# Altium PCB SmartScale.PcbDoc
Units mm, origin at the board's own origin, x right, y up, seen from the top; angles counter-clockwise.
Board outline 71 x 26 mm, 2 copper layers (Top Layer, Bottom Layer); 29 components, 26 nets, 127 pads, 0 vias.
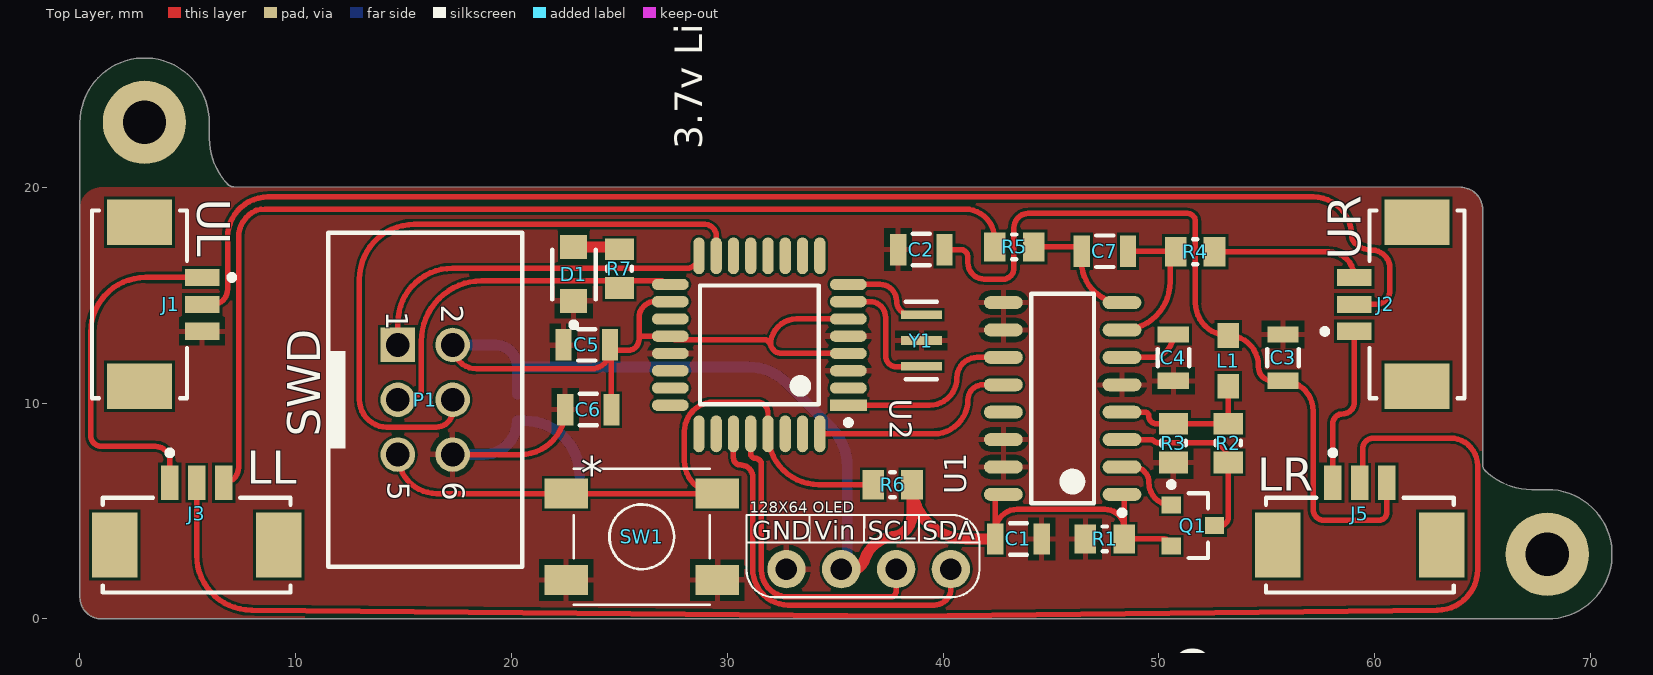
[diagram p0: Top Layer view]
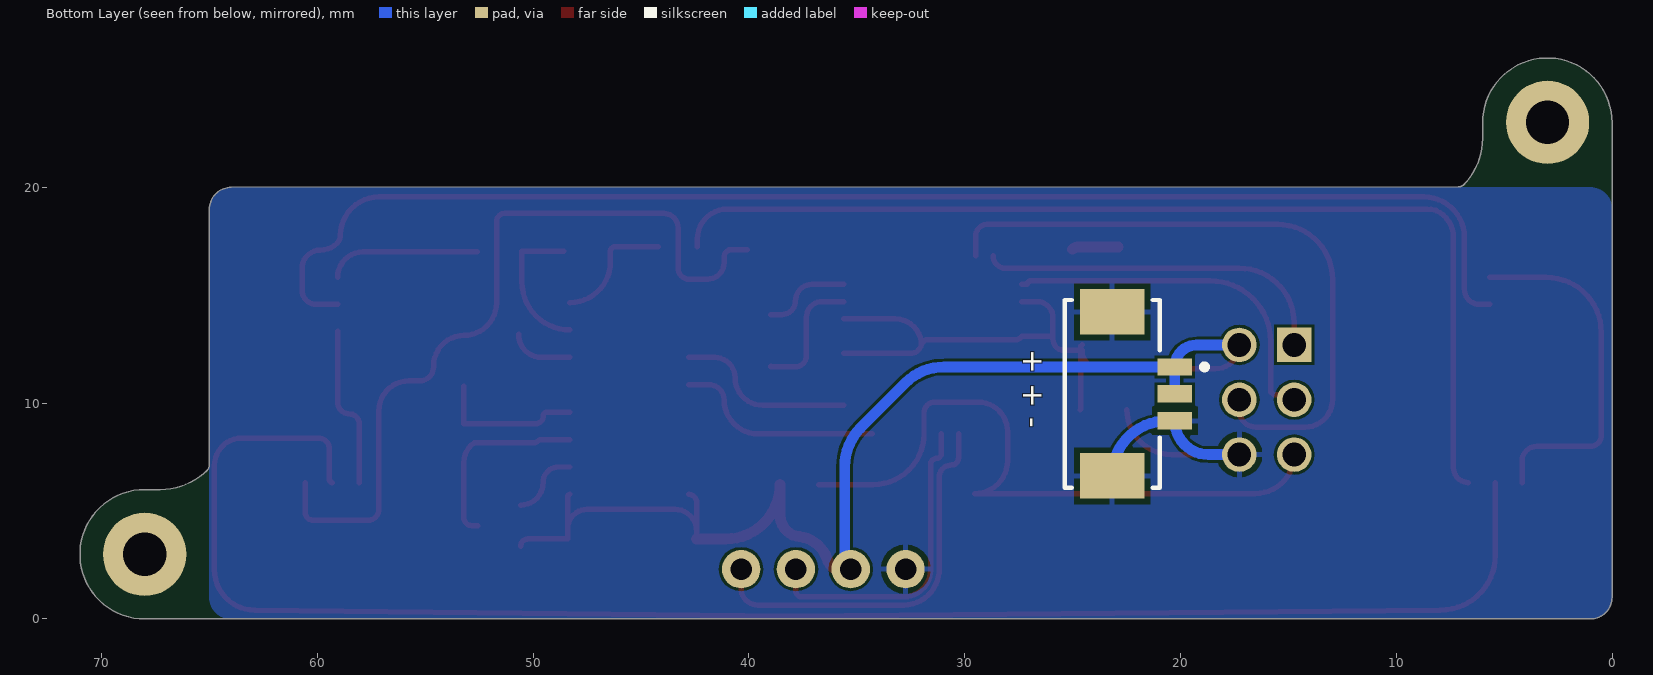
[diagram p1: Bottom Layer view, seen from below]
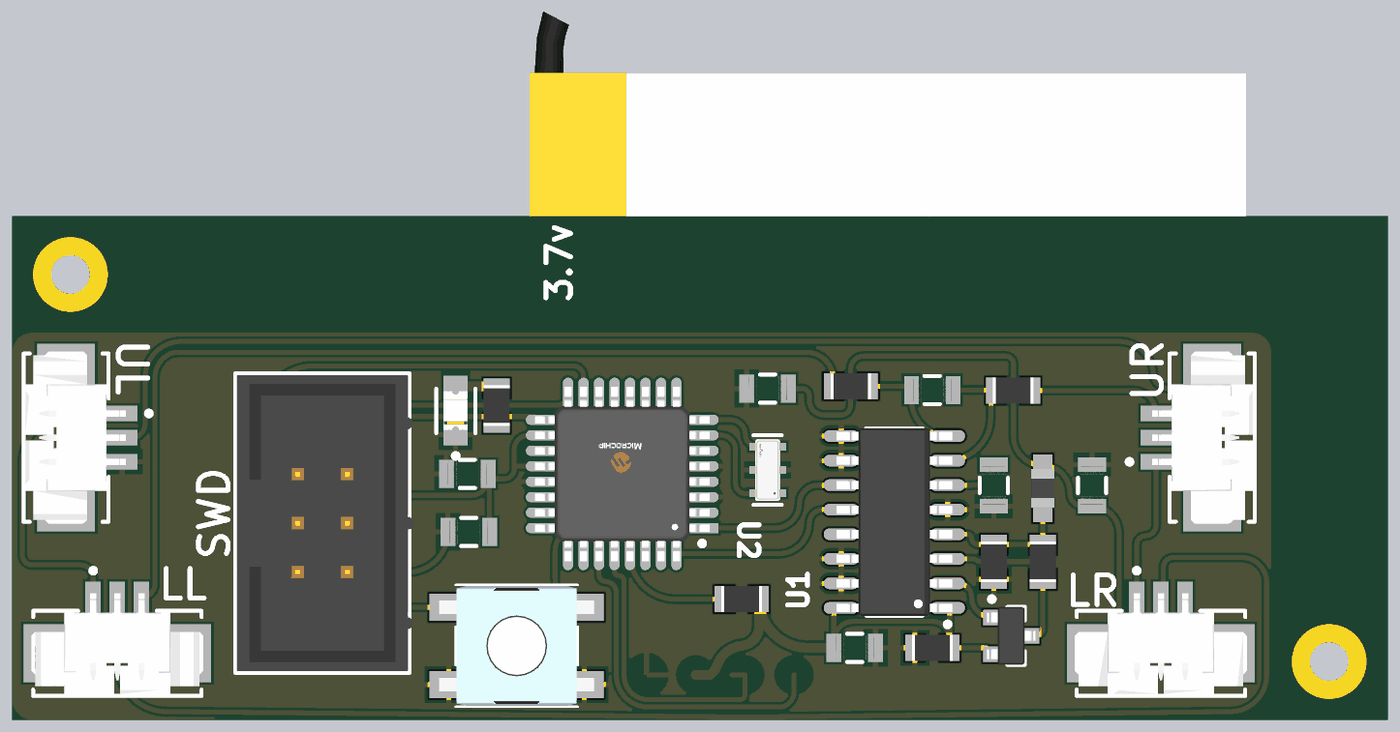
[diagram p2: 3D render of the assembled board from above, using the file's embedded part models]

## Layer stack, top to bottom
Top Solder: solder mask 0.0102, Solder Resist, Dk 3.5
Top Layer: signal copper 0.0356
Dielectric 1: dielectric 0.32, FR-4, Dk 4.8
Bottom Layer: signal copper 0.0356
Bottom Solder: solder mask 0.0102, Solder Resist, Dk 3.5

## Board outline
0,1 ccw(c1,1) 1,0 1.5,0 64,0 68,0 ccw(c68,3) 68,6 67.27,6 cw(c67.27,9.066) 65.102,6.898 cw(c65.336,7.132) 65.005,7.132 65,7.132 65,19 ccw(c64,19) 64,20 7.12,20.023 cw(c7.12,20.354) 6.885,20.12 6.898,20.102 cw(c9.066,22.27) 6,22.27 6,23 ccw(c3,23) 0,23

## Design rules (kind name [scope] priority, off if disabled: settings)
Clearance [All] p1: gap=0.127 ignorepadtopadclearanceinfootprint=FALSE except(0: Arc-Hole Track-Hole SMDPad-Hole THPad-Hole Via-Hole Fill-Hole Poly-Hole Region-Hole Text-Hole)
PolygonConnect [All] p1: connectstyle=Relief reliefconductorwidth=0.254 reliefentries=4 polygonreliefangle="90 Angle" airgapwidth=0.254
RoutingVias [All] p1: holewidth=0.711 width=1.27 viastyle="Through Hole" minholewidth=0.711 minwidth=1.27 maxholewidth=0.711 maxwidth=1.27
SolderMaskExpansion [All] p1: expansion=0.102 istentingtop=FALSE
Width [All] p1: maxlimit=1 minlimit=0.127 preferedwidth=0.254 minimp=50.000000 maximp=50.000000 favimp=50.000000
30 further rules are at their usual default settings.

## Classes and differential pairs
component class SmartScale: C1 C2 C3 C4 C5 C6 C7 D1 J1 J2 J3 J5 L1 P1 Q1 R1 R2 R3 R4 R5 R6 R7 SW1 U1 U2 Y1

## Components (designator, comment, footprint, x,y, rotation, side; value= is the part's Value field where it differs from the comment)
"3.7v Li-Po" "Comment" "LI-PO BATTERY" 24.892,19.812 r0 top
* "Oled 128x64" "OLED 128X64" 17.551,-23.119 r0 top
"+ + -" "UL" CONN_1X3_SMD 23.164,10.432 r270 bottom (schematic designator J4)
C1 "1.0uF" Cap_0805 43.493,3.709 r180 top
C2 "1.0uF" Cap_0805 38.991,17.119 r0 top
C3 "0.1uF" Cap_0805 55.751,12.112 r270 top
C4 "0.1uF" Cap_0805 50.671,12.112 r90 top
C5 "1.0uF" Cap_0805 23.486,12.704 r0 top
C6 "0.1uF" Cap_0805 23.561,9.704 r0 top
C7 "0.1uF" Cap_0805 47.496,17.044 r0 top
D1 "AVR_PRG" led_0805 22.883,15.984 r90 top
J1 "UL" CONN_1X3_SMD 2.761,14.579 r270 top
J2 "UR" CONN_1X3_SMD 61.961,14.579 r90 top
J3 "LL" CONN_1X3_SMD 5.411,3.424 r0 top
J5 "LR" CONN_1X3_SMD 59.311,3.424 r0 top
L1 "3.3uH" "SMD 0805_A" 53.211,11.964 r270 top
P1 "SWD" BoxHeader_2*6 16.002,10.16 r270 top
Q1 "MMBT4403LT1G" DIOD-SOT23-3_V 51.576,4.331 r0 top
R1 "10K" Res_0805 47.496,3.709 r0 top
R2 "20K" Res_0805 53.211,8.154 r270 top
R3 "8.2K" Res_0805 50.671,8.154 r90 top
R4 "100" Res_0805 51.678,17.018 r180 top
R5 "100" Res_0805 43.291,17.245 r0 top
R6 "10K" Res_0805 37.657,6.223 r0 top
R7 "1K" Res_0805 25,16.238 r270 top
SW1 "Reset" Button_smd 26.035,3.81 r180 top
U1 "HX711" TSOP16 45.541,10.219 r180 top
U2 "ATMEGA328P-ANR" ATMEGA328P_TQFP 31.486,12.704 r180 top
Y1 "16Mhz" Resonator_16Mhz 38.994,12.904 r270 top

## Footprints (in the part's own frame and the unit in brackets; to place one, negate y for a bottom-side part, rotate by r counter-clockwise, add the part's x,y. Pads: shape width x height; smd on the part's side, far side on the other; paste and mask are expansions set on the pad)
ATMEGA328P_TQFP [mm]
  rect 1.704x0.526 smd paste+0 mask+0: 1(-4.125,2.8)
  rrect100% 1.704x0.526 smd paste+0 mask+0: 2(-4.125,2) 3(-4.125,1.2) 4(-4.125,0.4) 5(-4.125,-0.4) 6(-4.125,-1.2) 7(-4.125,-2) 8(-4.125,-2.8) 17(4.125,-2.8) 18(4.125,-2) 19(4.125,-1.2) 20(4.125,-0.4) 21(4.125,0.4) 22(4.125,1.2) 23(4.125,2) 24(4.125,2.8)
  rrect100% 0.526x1.704 smd paste+0 mask+0: 9(-2.8,-4.125) 10(-2,-4.125) 11(-1.2,-4.125) 12(-0.4,-4.125) 13(0.4,-4.125) 14(1.2,-4.125) 15(2,-4.125) 16(2.8,-4.125) 25(2.8,4.125) 26(2,4.125) 27(1.2,4.125) 28(0.4,4.125) 29(-0.4,4.125) 30(-1.2,4.125) 31(-2,4.125) 32(-2.8,4.125)
  silkscreen extent -4.25,-2.75 2.75,3.72, body extent -5.23,-5.23 5.23,5.23, height 0.25
BoxHeader_2*6 [mm] "6 pins, straight, gold plating"
  rect 1.6x1.6 hole 1.1: 1(-2.54,-1.27)
  round 1.6 hole 1.1: 2(-2.54,1.27) 3(0,-1.27) 4(0,1.27) 5(2.54,-1.27) 6(2.54,1.27)
  silkscreen extent -7.74,-4.5 7.74,4.5, body extent -7.64,-4.43 7.64,4.75, height 9.13
Button_smd [mm] "6*6mm vertical type, SMD, height 2.5mm, salmon actuator, 360gf, T&R"
  rect 2x1.4 smd: 1(-3.5,2) 2(3.5,2) 3(-3.5,-2) 4(3.5,-2)
  silkscreen extent -3.15,-3.15 3.15,3.15, body extent -4,-3.1 4,3.1, height 2.49
Cap_0805 [mm]
  rect 0.756x1.456 smd paste+0 mask+0: 1(-1.075,0) 2(1.075,0)
  silkscreen extent -0.4,-0.73 0.4,0.73, body extent -1.7,-0.98 1.7,0.98, height 0.25
CONN_1X3_SMD [mm]
  rect 0.8x1.6 smd paste+0 mask+0: 1(-1.25,2.9) 2(0,2.9) 3(1.25,2.9)
  rect 2.1x3 smd paste+0 mask+0: 4(-3.8,0) 5(3.8,0)
  silkscreen extent -4.35,-2.2 4.35,4.4, body extent -4.45,-2.1 4.45,3.1, height 3.6
DIOD-SOT23-3_V [mm] "SOT23, 3-Leads, Body 3x1.4mm, Pitch 0.95mm"
  rect 0.9x0.8 smd: 1(-1,0.95) 2(-1,-0.95) 3(1,0)
  silkscreen extent -1.12,-1.5 0.7,2.02, body extent -1.25,-1.5 1.25,1.5, height 1.1
led_0805 [mm]
  rect 1.1x1.25 smd paste+0 mask+0: 1(-1.25,0) 2(1.25,0)
  silkscreen extent -2.47,-1.02 1.12,1, body extent -1.9,-0.77 1.9,0.77, height 0.25
"LI-PO BATTERY" [mm]
  body extent 1.82,1.62 38.82,16.81
"OLED 128X64" [mil]
  round 70 hole 39.37: 1(598.03,1001.18) 2(698.03,1001.18) 3(798.03,1001.18) 4(898.03,1001.18)
  Bottom Layer lines w10: 598.03,1001.18 599.06,1000.16 ; 698.03,1001.18 699.06,1000.16 ; 798.03,1001.18 799.06,1000.16 ; 898.03,1001.18 900,1003.15
  silkscreen extent 525,950 950,1100, body extent 213,-7 1287,1067, height 379
Res_0805 [mm] "Chip Resistor, 2-Leads, Body 2.1x1.35mm, IPC Medium Density"
  rect 1x1.35 smd: 1(-0.9,0) 2(0.9,0)
  silkscreen extent -0.1,-0.58 0.1,0.58, body extent -1.05,-0.68 1.05,0.67, height 0.6
Resonator_16Mhz [mm]
  rect 0.4x1.9 smd paste+0 mask+0: 1(1.2,0) 2(0,0) 3(-1.2,0)
  silkscreen extent -1.8,-0.72 1.8,0.72, body extent -1.78,-1.05 1.78,1.05, height 0.25
"SMD 0805_A" [mm] "Chip Inductor, 2-Leads, Body 2,0x1,2mm"
  rect 1.15x1 smd: 1(-1.175,0) 2(1.175,0)
  body extent -1,-0.6 1,0.6, height 0.89
TSOP16 [mm] "TSOP, 16-Leads, Body 9,90x3,90mm, Pitch 1,27mm, IPC Medium Density"
  oval 1.8x0.6 smd: 1(-2.75,4.445) 2(-2.75,3.175) 3(-2.75,1.905) 4(-2.75,0.635) 5(-2.75,-0.635) 6(-2.75,-1.905) 7(-2.75,-3.175) 8(-2.75,-4.445) 9(2.75,-4.445) 10(2.75,-3.175) 11(2.75,-1.905) 12(2.75,-0.635) 13(2.75,0.635) 14(2.75,1.905) 15(2.75,3.175) 16(2.75,4.445)
  silkscreen extent -2.88,-4.85 1.45,5.42, body extent -3,-4.85 3,4.85, height 1.6

## Part data
"+ + -" J1 J2 J3 J5: library part CONN_1X3_SMD, "CONN HEADER SMD R/A 3POS 1.25MM", Ambient Temperature Range High=+105°C, Ambient Temperature Range Low=-40°C, Current Rating=1A, Manufacturer=Molex, Manufacturer Part Number=53261-0371, Package=0, Temperature="-40°C to +105°C", Voltage Rating=125V, Automotive=No, Category=Conn, ComponentLink2Description=Datasheet, ComponentLink2URL=https://www.molex.com/webdocs/datasheets/pdf/en-us/0532610371_PCB_HEADERS.pdf, Conn Gender=Male, Conn Orientation="Right Angle", Contact Material=Tin,Nickel, Device Class L1=Connectors, Device Class L2="Headers and Wire Housings", Device Class L3=unset, Digikey Description="CONN HEADER SMD R/A 3POS 1.25MM", Footprint Url=https://www.molex.com/pdm_docs/sd/532610371_sd.pdf, Height=3.6mm, Lead Free=Yes, Mouser Description="1.25mm (.049\") Pitch PicoBlade Header, Surface Mount, Right Angle, Lead-free, 3 Circuits", Number Of Contacts=3, Number Of Rows=1, Octopart=https://octopart.com/53261-0371-molex-655314, Pitch=1.25mm, RoHS=TRUE, Temperature Range High=+105°C, Temperature Range Low=-40°C
C1 C2 C5: library part Cap_1.0uf, Manufacturer=Kemet, Part Number=C0805C105K4PACTU
C3 C4 C6 C7: library part Cap_0.1uf_0805, "Cap Ceramic 100nF 100V X7R 10% Pad SMD 0805 +125°C Automotive T/R", Capacitance=100nF, Case Code (Metric)=2012, Case Code (Imperial)=0805, Dielectric=X7R, Max Operating Temperature=125°C, Min Operating Temperature=-55°C, Package Quantity=1, Ratings=AEC-Q200, Tolerance=10%, Voltage Rating=100V, Case/Package=0805, Composition=Ceramic, Depth=1.25mm, Height=1.25mm, Lead Free="Lead Free", Length=2mm, Mount="Surface Mount", Packaging="Tape and Reel", Radiation Hardening=No, REACH SVHC="No SVHC", Termination=SMD/SMT, Thickness=0.057inch, Voltage Rating (DC)=100V, Weight=0.000194oz, Width=0.049inch
D1: library part Led_0805, "LED BLUE CLEAR CHIP SMD", Case Code (Metric)=2012, Case Code (Imperial)=0805, Color=Blue, Forward Current=20mA, Forward Voltage=3.8V, Lens Color=Colorless, Max Operating Temperature=80°C, Min Operating Temperature=-20°C, Package Quantity=1, Power Dissipation=76mW, Reverse Voltage=5V, Case/Package=0805, Depth=1.25mm, Dominant Wavelength=475nm, Height=0.8mm, Lead Free="Lead Free", Length=2mm, Lens Style=Diffused, Lens Transparency=Clear, Luminous Intensity=180mcd, Mount="Surface Mount", Number of Elements=1, Number of LEDs=1, Number of Pins=2, Packaging="Tape and Reel", Radiation Hardening=No, Test Current=20mA, Viewing Angle=130°, Wavelength=468nm, Width=1.25mm, Illumination Color=Blue
L1: library part COIL_3.3uH_0805, "Power Multilayer Inductor WE-PMI, L=3.30 µH", Manufacturer="Wuerth Elektronik", PartNumber=74479775233, Inductance="3.30 ÂµH", ComponentLink1Description="Manufacturer URL", ComponentLink1URL=http://www.we-online.com, ComponentLink2Description=Datasheet, ComponentLink2URL=http://katalog.we-online.de/kataloge/eisos/media/pdf/74479775233.pdf, PackageReference="SMD 0805_A"
P1: library part BoxHeader_2*6, "Male Box Header WR-BHD, THT, Vertical, pitch 2.54 mm, 6 pins", Contact Resistance=20mOhm, Manufacturer="Wurth Elektronik", Operating Temperature=-40to125degC, Package Reference=61200621621, Withstanding Voltage=500VAC, Working Voltage=250VAC, Datasheet URL=https://katalog.we-online.de/em/datasheet/6120xx21621.pdf, Gender=Male, Manufacturer URL=http://www.we-online.de, Mounting Technology=THT, Orientation=Vertical, Packaging=Tray, Part Number=61200621621, Pin Number=6, Pitch=2.54mm, Published Date=August2018, Publisher=WurthElektronik
Q1: library part BJT, "Switching Transistor, PNP Silicon, 3-Pin SOT-23, Pb-Free, Tape and Reel", Manufacturer="On Semiconductor", ComponentLink1Description="Manufacturer URL", ComponentLink1URL=http://www.onsemi.com/, ComponentLink2Description=Datasheet, ComponentLink2URL=http://www.onsemi.cn/pub_link/Collateral/MMBT4403LT1-D.PDF, ComponentLink3Description="Package Specification", ComponentLink3URL=http://www.onsemi.cn/pub_link/Collateral/318-08.PDF, DatasheetVersion="Rev. 12", fT Min (MHz)=200, Mounting Technology="Surface Mount", PackageDescription="3-Pin Small Outline Transistor, Body 2.92 x 1.3 mm, Pitch 0.95 mm", PackageReference=SOT-23-3-318-08, PackageVersion="Rev. AP, 11/2009", Packing="Tape and Reel", PartNumber=MMBT4403LT1G, Polarity=PNP, RoHS=TRUE, IC Continuous (A)=-0.6
R1 R6: library part Res_10k_0805, "Chip Resistor, 10 KOhm, +/- 1%, 0.125 W, -55 to 155 degC, 0805 (2012 Metric), RoHS, Tape and Reel", Manufacturer=Yageo, Max Operating Temperature="155 degC", Min Operating Temperature="-55 degC", Package Quantity=5000, Voltage Rating="150 V", ComponentLink1Description="Manufacturer URL", ComponentLink1URL=http://www.yageo.com/, ComponentLink2Description=Datasheet, ComponentLink2URL=http://www.yageo.com/documents/recent/PYu-RC_Group_51_RoHS_L_04.pdf, DatasheetVersion="Rev. 4, 02/2016", Height="0.5 mm", Length="2 mm", Mount="Surface Mount", Mounting Technology="Surface Mount", PackageDescription="2-Pin Surface Mounted Device, Body 2 x 1.25 mm", PackageReference=0805, Packaging="Tape and Reel", Pins=2, REACH SVHC="No SVHC", RoHSCompliant=true
R2: library part RES_20K, Manufacturer="Vishay Dale", Part Number=CRCW080520K0JNEA
R3: library part Res_8.2K, Manufacturer=Panasonic, Part Number=ERJ-6GEYJ822V
R4 R5: library part Res_100, Manufacturer="Vishay Dale", Part Number=CRCW0805100RFKEA
R7: library part res_1k_0805, "Chip Resistor, 1 KOhm, +/- 1%, 125 mW, -55 to 155 degC, 0805 (2012 Metric), RoHS, Tape and Reel", Case Code (Metric)=2012, Case Code (Imperial)=0805, Manufacturer=Yageo, Max Operating Temperature=155degC, Max Power Dissipation=125mW, Min Operating Temperature=-55degC, Package Description="2-Pin Surface Mounted Device, Body 2 x 1.25 mm", Package Quantity=1, Resistance=1KOhm, Temperature Coefficient=100ppm/degreesC, Tolerance=1%, Voltage Rating=150V, Case/Package=0805, Composition=ThickFilm, Datasheet URL=http://www.yageo.com/NewPortal/yageodocoutput?fileName=/pdf/R-Chip/PYu-RC_Group_51_RoHS_L_5.pdf, Datasheet Version="Rev. 5, 10/2016", Depth=1.25mm, Height=0.024inch, Lead Free=LeadFree, Length=0.079inch, Manufacturer URL=http://www.yageo.com/, Military Standard=Not, Number of Pins=2, Number of Terminations=2, Package Reference=0805, Packaging=TapeandReel, Power Rating=125mW, REACH SVHC=Unknown, RoHSCompliant=true, Termination=SMD/SMT, Voltage Rating (DC)=150V, Width=0.049inch
SW1: library part Button_smd, "WS-TASV SMD Tact Switch 6X6 mm", Manufacturer="Wuerth Elektronik", PartNumber=430451025836, ComponentLink1Description="Manufacturer URL", ComponentLink1URL=http://www.we-online.com, ComponentLink2Description=Datasheet, ComponentLink2URL=http://katalog.we-online.de/em/datasheet/4304x1.pdf, NoPins=04, PackageReference=430451025836
U1: "ADC for load cells", ComponentLink1Description=buying, ComponentLink1URL=https://ozdisan.com/entegre-devreler-ics/interface-entegreleri/analogtan-digitale-donusturucu-entegreler-adc/HX711
U2: library part ATMEGA328P_TQFP, "IC MCU 8BIT 32KB FLASH 32TQFP", Case/Package=TQFP, Frequency=20MHz, Max Operating Temperature=105°C, Min Operating Temperature=-40°C, Core Architecture=AVR, Memory Size=32KB, Memory Type=FLASH, Number of Pins=32, Number of I/Os=23, Oscillator Type=Internal, Packaging="Tape and Reel", Peripherals="Brown-out Detect/Reset", Interface=I2C
Y1: library part Resonator_16Mhz, "CERAMIC RES 16.0000MHZ 15PF SMD", Frequency=16MHz, Load Capacitance=15pF, Manufacturer=Murata, Manufacturer Part Number=CSTNE16M0V530000R0, Package=0, Temperature="-40°C to +85°C", Temperature Range High=+85°C, Temperature Range Low=-40°C, Tolerance=0.5%, Automotive=No, Category=Crys, ComponentLink2Description=Datasheet, ComponentLink2URL=https://www.murata.com/en-sg/products/productdata/8801162231838/SPEC-CSTNE16M0V530000R0.pdf?1545967809000, Device Class L1="Passive Components", Device Class L2="Crystals / Oscillators", Device Class L3=Crystals, Digikey Description="CERAMIC RES 16.0000MHZ 15PF SMD", Esr=40Ω, Height=1mm, Lead Free=Yes, Mouser Description="Ceramic Resonator 16MHz ±0.5% (Tol) ±0.3% (Stability) 15pF 40Ohm 3-Pin CSMD T/R", Octopart=https://octopart.com/cstne16m0v530000r0-murata-91406924, RoHS=TRUE, Series=CSTNE_V, Stability=0.3%

## Free pads (board coordinates)
  round 3.86 hole 2 unplated paste-1000 mask+0: ""(2.987,23.018) ""(68,3)

## Nets (pads, with @x,y where several pads share a name; then routed paths per layer and width w, separated by ;. In a path a pad name is that pad's centre, name@x,y a point inside that pad or via, vN(x,y) a via of type N, cw(c..) or ccw(c..) an arc to the next point about the centre after c; other vN are vias at no path point)
5V: "+ + -.1" "+ + -.2" *.2 C1.2 C5.2 C6.2 P1.2 Q1.2 R1.2 R6.2 U1.1 U1.16 U2.4 U2.6 U2.18 U2.20 | length 83.1
  Top Layer w0.254: P1.2 ccw(c18.377,12.7) 18.377,11.595 23.71,11.595 ccw(c23.71,12.446) 24.561,12.446 25.4,12.446 ccw(c25.4,12.954) 25.908,12.954 ; C5.2 24.625,12.64 24.625,9.715 C6.2 ; U2.18 26.642,14.704 ccw(c26.642,13.97) 25.908,13.97 25.908,12.954 ; U2.4 32.533,12.304 cw(c32.533,12.856) 32.004,12.7 ; U2.6 33.208,13.904 ccw(c33.208,12.7) 32.004,12.7 ; C1.2 C1.2@42.418,4.064 ; U1.16 ccw(c42.791,5.4) 42.418,5.4 C1.2@42.418,4.064 ; U1.1 cw(c48.291,5.669) 48.396,5.669 R1.2@48.396,4.182 ; Q1.2 ccw(c50.248,3.381) 50.248,3.709 R1.2 R1.2@48.396,4.182 ; 25.908,12.954 cw(c26.058,12.954) 26.058,13.104 U2.20 ccw(c27.595,13.202) 27.595,12.948 31.672,12.948 cw(c31.672,12.602) 32.004,12.7 ; C1.2@42.418,4.064 cw(c43.434,4.064) 43.434,5.08 47.498,5.08 cw(c47.498,4.182) R1.2@48.396,4.182
  Top Layer w0.508: *.2 36.017,2.311 ccw(c35.441,3.129) 36.387,2.804 cw(c37.821,2.311) 37.662,3.819 ccw(c37.557,4.814) 38.556,4.787 ccw(c36.017,4.851) 38.557,4.851 R6.2 ccw(c41.071,6.223) 41.071,3.709 C1.2
  Bottom Layer w0.5: P1.2 19.246,12.7 cw(c19.246,11.682) 20.264,11.682 ; 20.264,10.432 20.264,11.682 ; *.2@35.56,1.905 35.56,7.076 ccw(c33.02,7.076) 34.816,8.872 32.75,10.938 ccw(c30.954,9.142) 30.954,11.682 20.264,11.682
GND: "+ + -.3" "+ + -.4" "+ + -.5" *.1 C1.1 C2.1 C3.1 C4.1 C5.1 C6.1 D1.1 J1.3 P1.6 R1.1 R3.1 SW1.1 SW1.2 U1.5 U1.9 U1.10 U1.14 U1.15 U2.3 U2.5 U2.21 Y1.2 | length 14.6
  Top Layer w0.254: P1.6 20.402,7.62 ccw(c20.402,9.704) C6.1
  Bottom Layer w0.5: P1.6 18.702,7.62 ccw(c18.702,9.182) 20.264,9.182 20.624,9.182 cw(c20.624,6.642) 23.164,6.642 23.164,6.632
Net*_3: *.3 U2.28 | length 15.4
  Top Layer w0.254: U2.28 31.086,7.663 ccw(c31.306,7.663) 31.306,7.443 cw(c31.306,7.17) 31.579,7.17 31.579,2.275 ccw(c32.825,2.275) 32.825,1.029 33.207,1.029 37.493,1.029 37.566,1.029 ccw(c37.566,1.283) 37.818,1.249 ccw(c37.493,1.292) 37.821,1.292 *.3 *.3@37.155,2.311
Net*_4: *.4 U2.27 | length 18.2
  Top Layer w0.254: U2.27 30.286,7.463 ccw(c30.608,7.463) 30.608,7.14 cw(c30.608,6.57) 31.179,6.57 31.179,2.311 31.179,2.309 ccw(c32.854,2.309) 31.549,1.26 ccw(c32.826,2.287) 32.826,0.648 32.827,0.648 39.594,0.648 ccw(c39.594,1.415) 40.361,1.415 *.4
NetC2_2: C2.2 C3.2 J5.3 L1.1 | length 37.2
  Top Layer w0.254: C2.2 40.793,17.119 cw(c40.793,16.764) 41.148,16.764 41.148,16.51 ccw(c41.91,16.51) 41.91,15.748 42.775,15.748 ccw(c42.775,16.257) 43.284,16.257 43.284,18.138 cw(c43.942,18.138) 43.942,18.796 51.308,18.796 cw(c51.308,18.412) 51.692,18.412 51.692,14.658 ccw(c53.211,14.658) L1.1 cw(c53.211,11.74) 54.61,11.74 54.61,11.684 ccw(c55.257,11.684) 55.257,11.037 C3.2 cw(c55.751,9.638) 57.15,9.638 57.15,5.08 ccw(c57.658,5.08) 57.658,4.572 60.198,4.572 ccw(c60.198,4.935) 60.561,4.935 J5.3
NetC4_2: C4.2 U1.6 | length 3
  Top Layer w0.254: U1.6 49.608,12.124 ccw(c49.608,13.187) C4.2
NetC7_1: C7.1 R5.2 U1.8 | length 5.8
  Top Layer w0.254: R5.2 46.22,17.245 cw(c46.22,17.044) C7.1 46.421,16.534 ccw(c48.291,16.534) U1.8
NetC7_2: C7.2 R4.2 U1.7 | length 6.9
  Top Layer w0.254: U1.7 ccw(c48.291,15.623) 50.52,15.623 50.52,17.044 C7.2
NetD1_2: D1.2 R7.1 | length 2.1
  Top Layer w0.5: D1.2 24.768,17.234 cw(c24.768,16.906) R7.1
NetJ1_1: J1.1 J3.1 | length 16.7
  Top Layer w0.254: J3.1 4.161,7.339 ccw(c3.5,7.339) 3.5,8 1,8 cw(c1,8.5) 0.5,8.5 0.5,13.289 cw(c3.04,13.289) 3.04,15.829 J1.1
NetJ1_2: J1.2 J2.2 | length 63.8
  Top Layer w0.254: J1.2 6.15,14.579 ccw(c6.15,15.271) 6.842,15.271 6.842,17.687 cw(c8.713,17.687) 8.713,19.558 57.15,19.558 cw(c57.15,17.78) 58.928,17.78 ccw(c59.436,17.78) 59.077,17.42 ccw(c59.87,18.214) 59.872,17.092 cw(c59.87,16.256) 60.706,16.256 60.706,15.24 cw(c60.045,15.24) 60.045,14.579 J2.2
NetJ2_1: J2.1 J5.1 | length 7.6
  Top Layer w0.254: J5.1 58.061,9.061 cw(c58.5,9.061) 58.5,9.5 ccw(c58.5,10.061) 59.061,10.061 J2.1
NetJ2_3: J2.3 R4.1 | length 7.2
  Top Layer w0.254: R4.1 57.872,17.018 cw(c57.872,15.829) J2.3
NetJ3_2: J3.2 J5.2 | length 78.1
  Top Layer w0.254: J3.2 5.411,2.949 ccw(c7.951,2.949) 7.951,0.409 cw(c7.95,0.155) 7.954,0.409 38.083,0.127 ccw(c38.1,1.905) 38.12,0.127 62.889,0.409 cw(c62.893,0.155) 62.893,0.409 ccw(c62.893,2.286) 64.77,2.286 64.77,7.112 ccw(c63.5,7.112) 63.5,8.382 59.944,8.382 ccw(c59.944,7.874) 59.436,7.874 59.436,6.449 cw(c59.311,6.449) J5.2
NetJ3_3: J3.3 R5.1 | length 48.7
  Top Layer w0.254: J3.3 ccw(c6.661,7.013) 7.35,7.013 7.35,17.687 cw(c8.713,17.687) 8.132,18.92 cw(c8.24,18.69) 8.169,18.934 cw(c8.578,17.526) 8.578,18.992 41.006,18.992 cw(c41.006,17.606) 42.391,17.606 R5.1
NetL1_2: L1.2 R2.1 R3.2 U1.4 | length 7
  Top Layer w0.254: U1.4 49.344,9.584 cw(c49.344,9.398) 49.53,9.398 ccw(c49.874,9.398) 49.874,9.054 R3.2 R2.1 L1.2
NetP1_1: P1.1 U2.16 | length 16.7
  Top Layer w0.254: P1.1 14.732,13.716 cw(c17.272,13.716) 17.272,16.256 28.112,16.256 ccw(c28.112,16.83) U2.16
NetP1_3: P1.3 R7.2 U2.17 | length 16.8
  Top Layer w0.254: P1.3 14.954,10.382 15.672,10.382 15.821,10.531 15.821,12.871 cw(c18.62,12.871) 18.62,15.67 25,15.67 26.94,15.67 cw(c26.94,15.504) 27.106,15.504 U2.17
NetP1_4: P1.4 U2.15 | length 30.8
  Top Layer w0.254: P1.4 17.272,9.652 cw(c16.51,9.652) 16.51,8.89 14.224,8.89 cw(c14.224,10.16) 12.954,10.16 12.954,15.748 cw(c15.494,15.748) 15.494,18.288 28.956,18.288 cw(c28.956,17.758) 29.486,17.758 U2.15
NetP1_5: P1.5 R6.1 SW1.3 SW1.4 U2.29 | length 31.7
  Top Layer w0.254: P1.5 ccw(c16.542,7.62) 16.542,5.81 SW1.4 SW1.3 cw(c29.535,7.331) 28.014,7.331 28.014,8.69 cw(c29.373,8.69) 28.29,9.51 cw(c28.492,9.356) 28.313,9.537 ccw(c27.95,9.904) 28.37,9.603 cw(c28.577,9.455) 28.394,9.632 cw(c29.373,8.69) 29.373,10.049 31.393,10.049 cw(c31.393,9.556) 31.886,9.556 U2.29 ccw(c34.242,8.579) 34.242,6.223 R6.1
NetQ1_1: Q1.1 U1.2 | length 3.3
  Top Layer w0.254: U1.2 48.836,7.044 cw(c48.836,6.35) 49.53,6.35 49.53,6.327 ccw(c50.576,6.327) Q1.1
NetQ1_3: Q1.3 R2.2 U1.3 | length 8.9
  Top Layer w0.254: U1.3 49.596,8.314 cw(c49.597,8.06) 49.757,8.257 ccw(c49.996,8.554) 49.996,8.173 52.64,8.173 52.724,8.173 cw(c52.101,7.254) R2.2 53.211,4.697 cw(c52.845,4.697) 52.845,4.331 Q1.3
NetU1_11: U1.11 U2.1 | length 8.4
  Top Layer w0.254: U2.1 39.368,9.904 ccw(c39.368,11.176) 40.64,11.176 cw(c41.588,11.176) 41.588,12.124 U1.11
NetU1_12: U1.12 U2.32 | length 9.8
  Top Layer w0.254: U2.32 39.567,8.579 ccw(c39.567,10.16) 41.148,10.16 cw(c41.842,10.16) 41.842,10.854 U1.12
NetU2_7: U2.7 Y1.1 | length 5.9
  Top Layer w0.254: U2.7 36.604,14.704 cw(c36.604,13.97) 37.338,13.97 37.338,12.192 ccw(c37.846,12.192) 37.846,11.684 38.974,11.684 ccw(c38.974,11.704) Y1.1
NetU2_8: U2.8 Y1.3 | length 4.2
  Top Layer w0.254: U2.8 37.074,15.504 cw(c37.074,14.732) 37.846,14.732 ccw(c38.474,14.732) 38.474,14.104 Y1.3
pads on no net: J1.4 J1.5 J2.4 J2.5 J3.4 J3.5 J5.4 J5.5 U1.13 U2.2 U2.9 U2.10 U2.11 U2.12 U2.13 U2.14 U2.19 U2.22 U2.23 U2.24 U2.25 U2.26 U2.30 U2.31

## Polygon pours and split planes (outlines as drawn)
GND on Top Layer "NONET_L01_P-001" (solid, pour order 0): 0,19 cw(c1,19) 1,20 64,20 cw(c64,19) 65,19 65,1 cw(c64,1) 64,0 1,0 cw(c1,1) 0,1
GND on Bottom Layer "NONET_L01_P-001" (solid, pour order 1): 0,19 cw(c1,19) 1,20 64,20 cw(c64,19) 65,19 65,1 cw(c64,1) 64,0 1,0 cw(c1,1) 0,1

## Silkscreen, mask and mechanical layers (free items; w line width, h text height)
Mechanical 1:
  lines w0.1: 6.885,20.12 ccw(c7.12,20.354) 7.12,20.023 64,20 cw(c64,19) 65,19 65,7.132 ; 65.005,7.132 ccw(c65.336,7.132) 65.102,6.898 ccw(c67.27,9.066) 67.27,6 68,6 cw(c68,3) 68,0 64,0 1.5,0 1,0 cw(c1,1) 0,1 0,19 0,23 cw(c3,23) 6,23 6,22.27 ccw(c9.066,22.27) 6.898,20.102 ; 6.898,20.102 6.898,20.102

## Text inside footprints (layer, text, board x,y; h text height)
*: Top Overlay "128X64 OLED" at 31.037,4.933 h0.51; Top Overlay "SDA" at 39.038,3.663 h0.86; Top Overlay "GND" at 31.164,3.663 h0.86; Top Overlay "Vin" at 34.061,3.663 h0.86; Top Overlay "SCL" at 36.498,3.663 h0.86
P1: Top Overlay "5" at 14.262,6.36 h1.02 r270; Top Overlay "2" at 16.742,14.56 h1.02 r270; Top Overlay "6" at 16.802,6.36 h1.02 r270; Top Overlay "1" at 14.202,14.26 h1.02 r270